# Altium PCB master-pcb.PcbDoc
Units mm, origin at the board's own origin, x right, y up, seen from the top; angles counter-clockwise.
Board outline 55.88 x 58.42 mm, 2 copper layers (Top Layer, Bottom Layer); 12 components, 14 nets, 84 pads, 0 vias.
Unrouted connection lines stored in the file: 2.
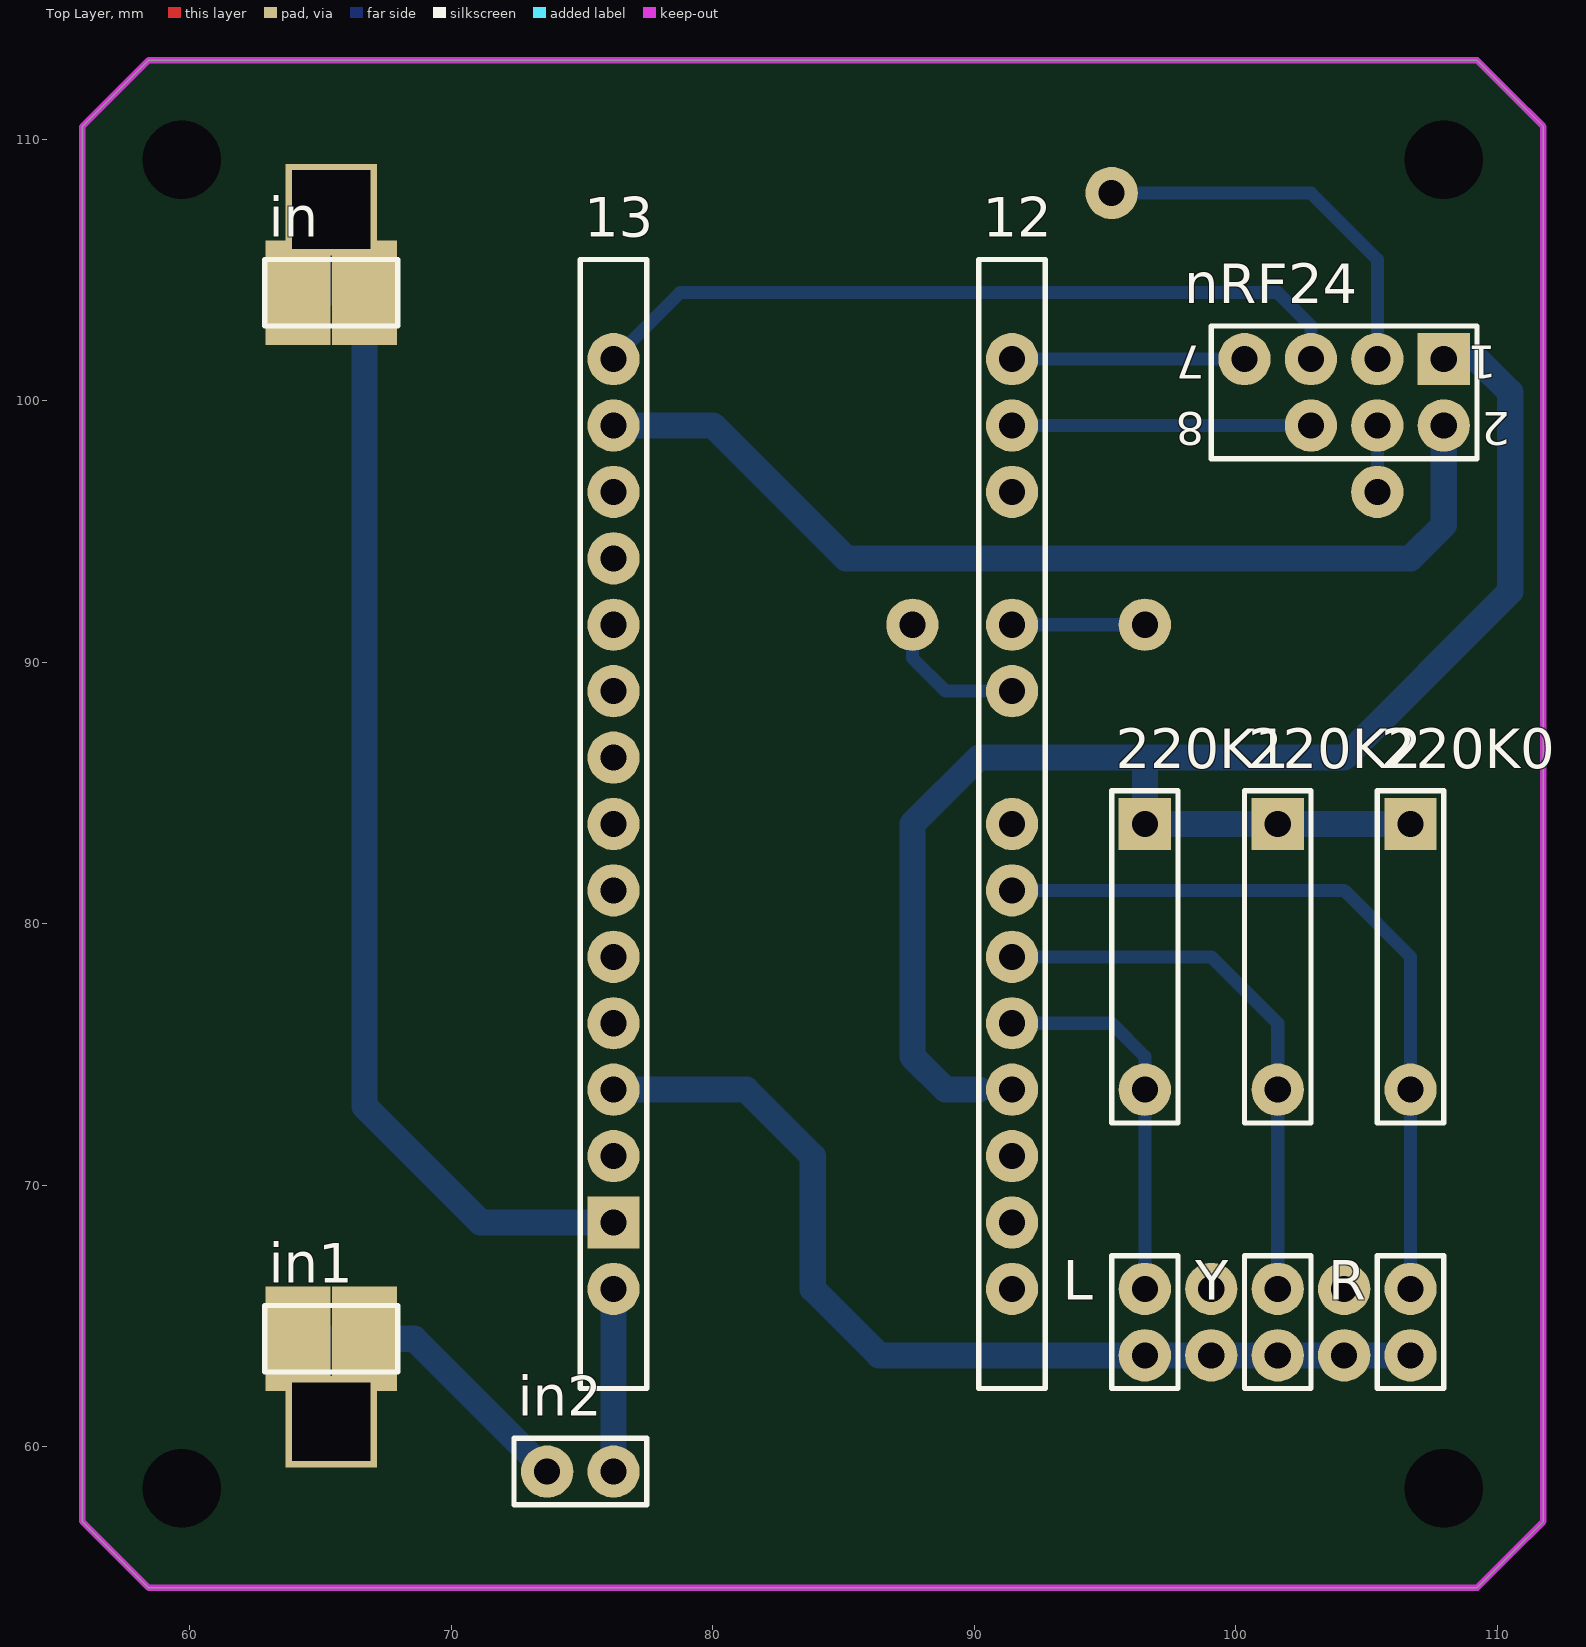
[diagram p0: Top Layer view]
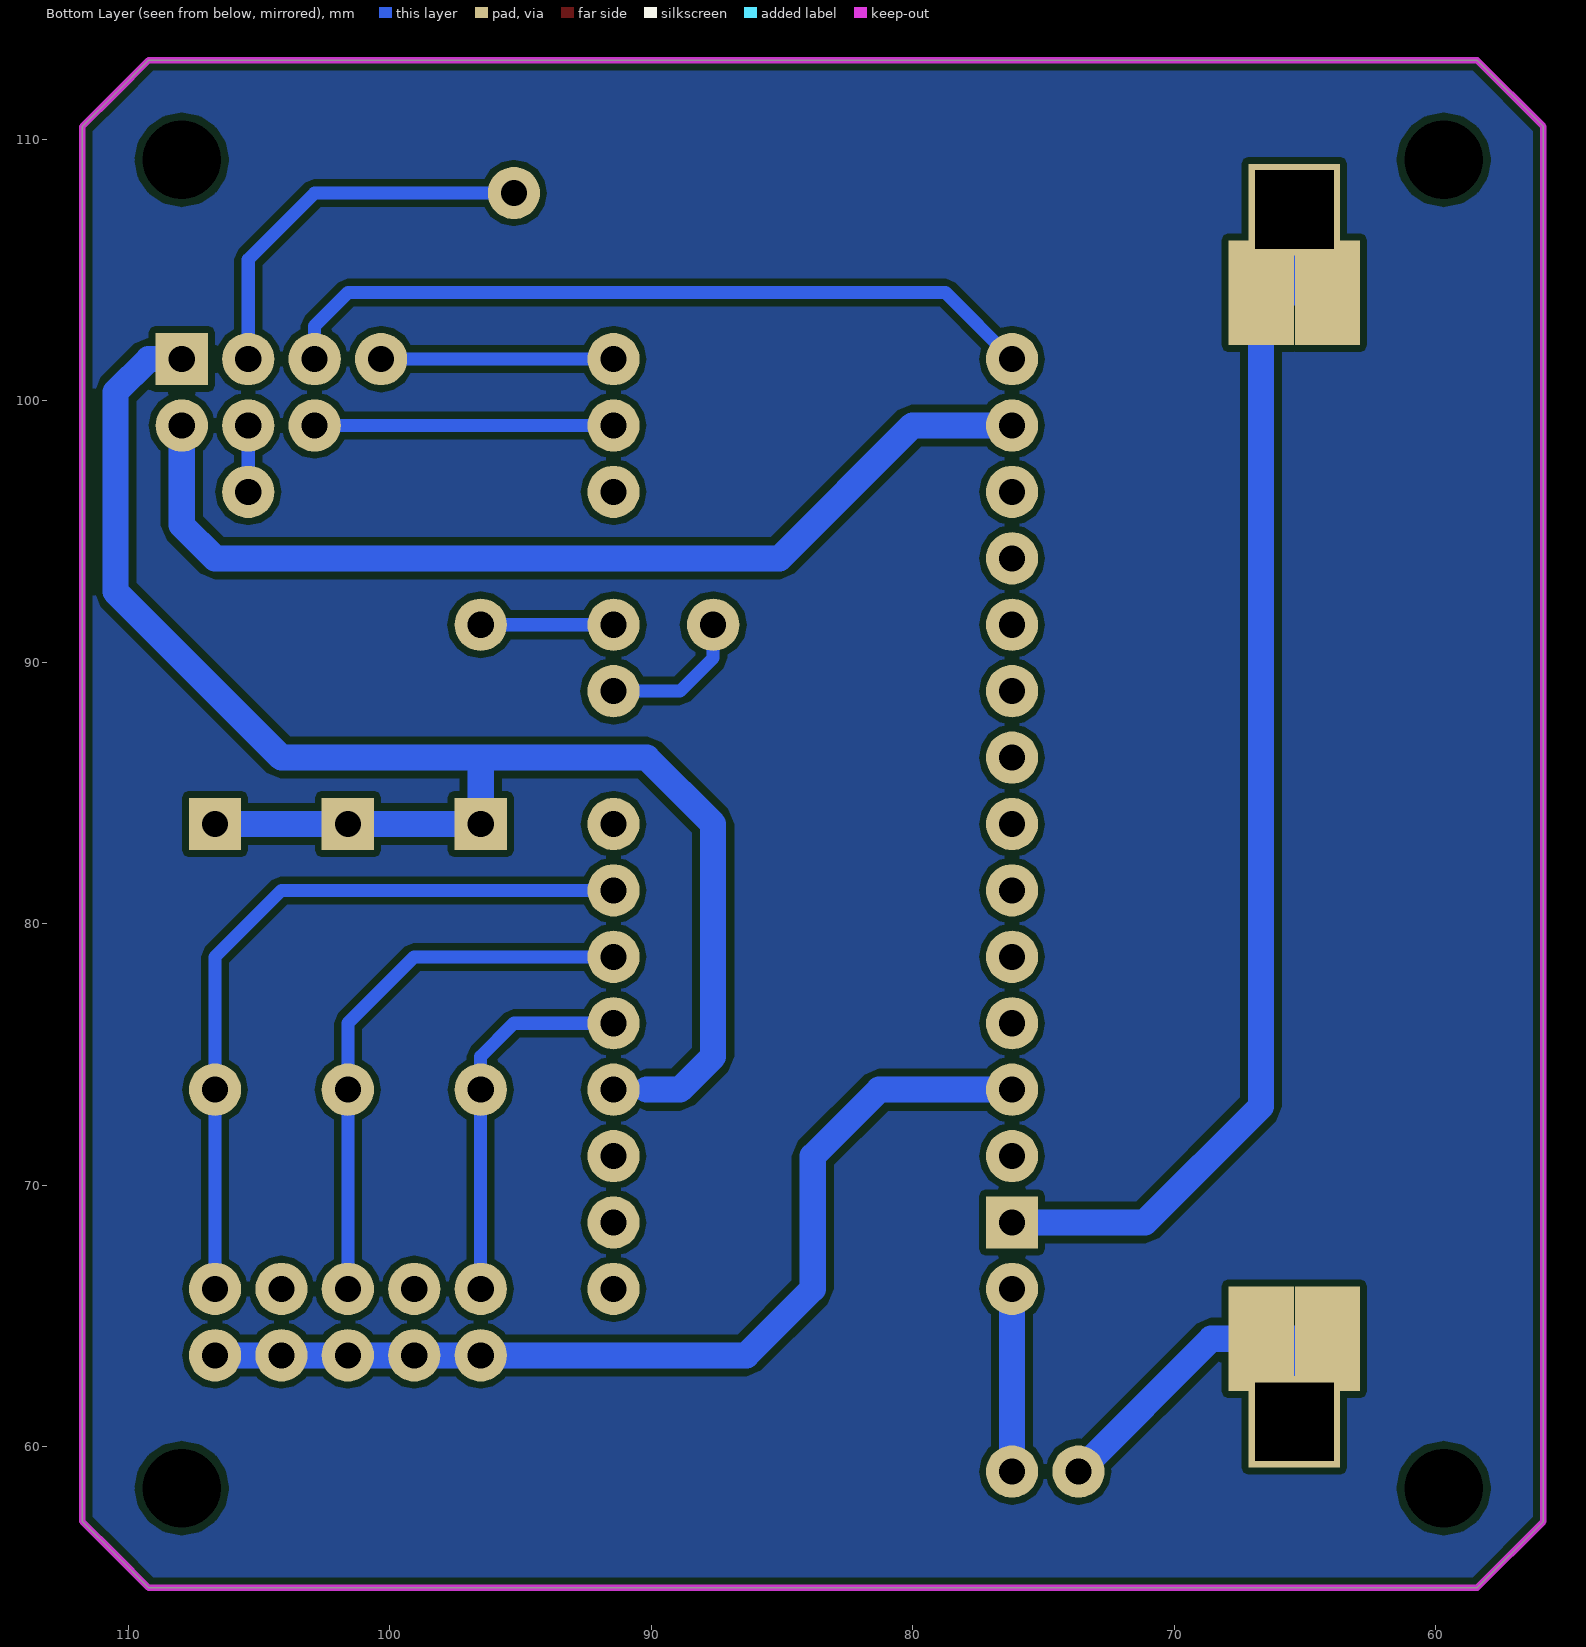
[diagram p1: Bottom Layer view, seen from below]

## Layer stack, top to bottom
Top Solder: solder mask 0.0102, Solder Resist, Dk 3.5
Top Layer: signal copper 0.0356
Dielectric 1: dielectric 0.32, FR-4, Dk 4.8
Bottom Layer: signal copper 0.0356
Bottom Solder: solder mask 0.0102, Solder Resist, Dk 3.5

## Board outline
55.88,57.15 58.42,54.61 109.22,54.61 110.49,55.88 111.76,57.15 111.76,110.49 110.49,111.76 109.22,113.03 58.42,113.03 55.88,110.49

## Design rules (kind name [scope] priority, off if disabled: settings)
Clearance [All] p1: gap=0.254 ignorepadtopadclearanceinfootprint=FALSE except(0: Arc-Hole Track-Hole SMDPad-Hole THPad-Hole Via-Hole Fill-Hole Poly-Hole Region-Hole Text-Hole)
PolygonConnect [All] p1: connectstyle=Relief reliefconductorwidth=0.254 reliefentries=4 polygonreliefangle="90 Angle" airgapwidth=0.254
RoutingVias [All] p1: holewidth=0.711 width=1.27 viastyle="Through Hole" minholewidth=0.711 minwidth=1.27 maxholewidth=0.711 maxwidth=1.27
SolderMaskExpansion [All] p1: expansion=0.102
Width Width_1 [InNet('GND','GND2','VCC','VCC1')] p1: maxlimit=2 minlimit=0.254 preferedwidth=1
Width [All] p2: maxlimit=2 minlimit=0.254 preferedwidth=0.5
30 further rules are at their usual default settings.

## Classes and differential pairs
component class master-pcb: 12 13 220K0 220K1 220K2 in1 in2 L nRF24 R Y

## Components (designator, comment, footprint, x,y, rotation, side; value= is the part's Value field where it differs from the comment)
12 "Header 17" HDR1X17#1 91.44,104.14 r270 top
13 "Header 17" HDR1X17#2 76.2,104.14 r270 top
220K0 "Header 5" HDR1X5 106.68,73.66 r90 top
220K1 "Header 5" HDR1X5 96.52,73.66 r90 top
220K2 "Header 5" HDR1X5 101.6,73.66 r90 top
in "Header 2" HDR1X2#1 64.135,104.14 r0 top
in1 "Header 2" HDR1X2#1 64.135,64.135 r0 top
in2 "Header 2" HDR1X2#2 73.66,59.055 r0 top
L "Header 2" HDR1X2#2 96.52,63.5 r90 top
nRF24 "Header 4X2" HDR2X4 107.95,101.6 r180 top
R "Header 2" HDR1X2#2 106.68,63.5 r90 top
Y "Header 2" HDR1X2#2 101.6,63.5 r90 top

## Footprints (in the part's own frame and the unit in brackets; to place one, negate y for a bottom-side part, rotate by r counter-clockwise, add the part's x,y. Pads: shape width x height; smd on the part's side, far side on the other; paste and mask are expansions set on the pad)
HDR1X2#1 [mm] "Connector; Header; 2 Position"
  rect 2.5x4 all layers, no hole: 1(0,0) 2(2.54,0)
  silkscreen extent -1.27,-1.27 3.81,1.27
HDR1X2#2 [mm] "Connector; Header; 2 Position"
  round 2 hole 1: 1(0,0) 2(2.54,0)
  silkscreen extent -1.27,-1.27 3.81,1.27
HDR1X5 [mm] "Connector; Header; 5 Position"
  round 2 hole 1: 1(0,0)
  round 0 all layers, no hole: 2(2.54,0) 3(5.08,0) 4(7.62,0)
  rect 2x2 hole 1: 5(10.16,0)
  silkscreen extent -1.27,-1.27 11.43,1.27
HDR1X17#1 [mm] "Connector; Header; 17 Position"
  round 0 all layers, no hole: 1(0,0) 4(7.62,0) 5(10.16,0) 8(17.78,0) 17(40.64,0)
  round 2 hole 1: 2(2.54,0) 3(5.08,0) 6(12.7,0) 7(15.24,0) 9(20.32,0) 10(22.86,0) 11(25.4,0) 12(27.94,0) 13(30.48,0) 14(33.02,0) 15(35.56,0) 16(38.1,0)
  silkscreen extent -1.27,-1.27 41.91,1.27
HDR1X17#2 [mm] "Connector; Header; 17 Position"
  round 0 all layers, no hole: 1(0,0) 17(40.64,0)
  round 2 hole 1: 2(2.54,0) 3(5.08,0) 4(7.62,0) 5(10.16,0) 6(12.7,0) 7(15.24,0) 8(17.78,0) 9(20.32,0) 10(22.86,0) 11(25.4,0) 12(27.94,0) 13(30.48,0) 14(33.02,0) 16(38.1,0)
  rect 2x2 hole 1: 15(35.56,0)
  silkscreen extent -1.27,-1.27 41.91,1.27
HDR2X4 [mm] "Connector; Header; 4x2 Position"
  rect 2x2 hole 1: 1(0,0)
  round 2 hole 1: 2(0,2.54) 3(2.54,0) 4(2.54,2.54) 5(5.08,0) 6(5.08,2.54) 7(7.62,0)
  round 0 all layers, no hole: 8(7.62,2.54)
  silkscreen extent -1.27,-1.27 8.89,3.81

## Part data
12 13: "Header, 17-Pin", LatestRevisionDate=17-Jul-2002, LatestRevisionNote="Re-released for DXP Platform.", Publisher="Altium Limited"
220K0 220K1 220K2: "Header, 5-Pin", LatestRevisionDate=17-Jul-2002, LatestRevisionNote="Re-released for DXP Platform.", Publisher="Altium Limited"
in in1 in2 L R Y: "Header, 2-Pin", LatestRevisionDate=17-Jul-2002, LatestRevisionNote="Re-released for DXP Platform.", Publisher="Altium Limited"
nRF24: "Header, 4-Pin, Dual row", LatestRevisionDate=17-Jul-2002, LatestRevisionNote="Re-released for DXP Platform.", Publisher="Altium Limited"

## Free pads (board coordinates)
  round 0 hole 3: 2(59.69,58.42) 3(107.95,58.42) 11(59.69,109.22) 12(107.95,109.22)
  round 2 hole 1: 7(87.63,91.44) 14(96.52,91.44) 15(105.41,96.52) 18(95.25,107.95) 20(91.44,96.52) 21(99.06,66.04) 22(99.06,63.5) 23(104.14,63.5) 24(104.14,66.04)
  rect 3.5x3.5 hole 3 square: 28(65.405,107.315) 29(65.405,60.96)

## Nets (pads, with @x,y where several pads share a name; then routed paths per layer and width w, separated by ;. In a path a pad name is that pad's centre, name@x,y a point inside that pad or via, vN(x,y) a via of type N, cw(c..) or ccw(c..) an arc to the next point about the centre after c; other vN are vias at no path point)
GND: 13.15 in.1 in.2 pad.28 | length 47.6
  Bottom Layer w1: pad.28@65.405,107.95 pad.28 65.405,104.14 in.2 66.675,73.025 71.12,68.58 13.15
GND2: 12.13 220K0.5 220K1.5 220K2.5 nRF24.1 | length 61.9
  Bottom Layer w1: 90.17,73.66 88.9,73.66 87.63,74.93 87.63,83.82 90.17,86.36 96.52,86.36 ; 220K0.5 220K2.5 220K1.5 96.52,86.36 ; nRF24.1 109.22,101.6 110.49,100.33 110.49,92.71 104.14,86.36 96.52,86.36
Net12_2: 12.2 nRF24.7 | length 8.9
  Bottom Layer w0.5: 12.2 nRF24.7
Net12_3: 12.3 nRF24.6 | length 11.4
  Bottom Layer w0.5: 12.3 nRF24.6
Net12_6: 12.6 nRF24.4 pad.14 pad.15 | length 7.6
  Bottom Layer w0.5: 12.6 pad.14 ; pad.15 nRF24.4
Net12_7: 12.7 nRF24.3 pad.7 pad.18 | length 20.6
  Bottom Layer w0.5: pad.7 87.63,90.17 88.9,88.9 12.7 ; pad.18 102.87,107.95 105.41,105.41 nRF24.3
Net12_10: 12.10 220K0.1 R.2 | length 29
  Bottom Layer w0.5: 12.10 104.14,81.28 106.68,78.74 220K0.1 R.2
Net12_11: 12.11 220K2.1 Y.2 | length 21.4
  Bottom Layer w0.5: 12.11 99.06,78.74 101.6,76.2 220K2.1 Y.2
Net12_12: 12.12 220K1.1 L.2 | length 14.5
  Bottom Layer w0.5: 12.12 95.25,76.2 96.52,74.93 220K1.1 L.2
Net13_2: 13.2 nRF24.5 | length 29.5
  Bottom Layer w0.5: 13.2 78.74,104.14 101.6,104.14 102.87,102.87 nRF24.5
Net13_16: 13.16 in2.2 | length 7
  Bottom Layer w1: in2.2 13.16
Netin1_1: in1.1 in1.2 in2.1 pad.29 | length 14.2
  Bottom Layer w0.5: pad.29@65.405,60.325 pad.29 65.405,64.135
  Bottom Layer w1: 65.405,64.135 in1.2 68.58,64.135 in2.1
VCC: 13.13 L.1 pad.22 pad.23 R.1 Y.1 | length 37.7
  Bottom Layer w1: 13.13 81.28,73.66 83.82,71.12 83.82,66.04 86.36,63.5 L.1 pad.22 Y.1 pad.23 R.1
VCC1: 13.3 nRF24.2 | length 38.2
  Bottom Layer w1: 13.3 80.01,99.06 85.09,93.98 106.68,93.98 107.95,95.25 nRF24.2
pads on no net: 12.1 12.4 12.5 12.8 12.9 12.14 12.15 12.16 12.17 13.1 13.4 13.5 13.6 13.7 13.8 13.9 13.10 13.11 13.12 13.14 13.17 220K0.2 220K0.3 220K0.4 220K1.2 220K1.3 220K1.4 220K2.2 220K2.3 220K2.4 nRF24.8

## Polygon pours and split planes (outlines as drawn)
no net on Bottom Layer "Top Layer-No Net" (solid, pour order 12): 55.88,110.49 58.42,113.03 109.22,113.03 111.76,110.49 111.76,57.15 109.22,54.61 58.42,54.61 55.88,57.15

## Keep-outs
Keep-Out Layer:
  lines w0.254: 55.88,57.15 58.42,54.61 109.22,54.61 110.49,55.88 111.76,57.15 111.76,110.49 110.49,111.76 109.22,113.03 77.47,113.03 58.42,113.03 55.88,110.49 55.88,57.15

## Text inside footprints (layer, text, board x,y; h text height)
nRF24: Top Overlay "2" at 110.49,99.568 h1.27 r180; Top Overlay "1" at 109.982,102.108 h1.27 r180; Top Overlay "7" at 98.806,102.108 h1.27 r180; Top Overlay "8" at 98.806,99.568 h1.27 r180